# EAGLE board botão (EAGLE 9.7.0)

Size 156.94 x 59.69 mm. Coordinates in mm from the lower left corner, seen from the top.
Outline: 0,0 156.94,0 156.94,59.69 0,59.69 0,0
Copper layers (1*16): Top 0.035mm / dielectric 1.5mm / Bottom 0.035mm
Design rules "default": minimum track width 6mil, minimum drill 0.35mm, track to track 6mil, track to pad 6mil, pad to pad 6mil, via to via 6mil, smd to smd 6mil, copper to edge 40mil, drill to drill 6mil, minimum pad ring 10mil, minimum via ring 8mil, stop-mask expansion 4mil, vias tented up to drill 0mil, thermal gap 10mil

## Footprints (pad centres in the part's own frame; a part is rotated, then mirrored left to right if it is on the bottom)
LED-RGB-5MM = drill 0.9: B 0.635,0.635; C -0.635,-0.635; G 1.905,-0.635; R -1.905,0.635
RESAD1016W63L850D250B = drill 0.83 pad 1.43: 1 -5.08,0; 2 5.08,0
SWITCH-MOMENTARY-PTH-6.5MM = drill 1.016 pad 1.88: 1 -3.251,2.261; 2 3.251,2.261; 3 -3.251,-2.261; 4 3.251,-2.261
ARDUINO-UNO-R3-SHIELD = drill 1.016 pad 1.88: 3.3V 24.13,-2.54; 5V 24.13,0; A0 24.13,12.7; A1 24.13,15.24; A2 24.13,17.78; A3 24.13,20.32; A4 24.13,22.86; A5 24.13,25.4; AREF -24.13,-13.97; D2 -24.13,20.32; D3 -24.13,17.78; D4 -24.13,15.24; D5 -24.13,12.7; D6 -24.13,10.16; D7 -24.13,7.62; D8 -24.13,3.81; D9 -24.13,1.27; D10 -24.13,-1.27; D11 -24.13,-3.81; D12 -24.13,-6.35; D13 -24.13,-8.89; GND@0 24.13,2.54; GND@1 24.13,5.08; GND@2 -24.13,-11.43; IOREF 24.13,-7.62; NC 24.13,-10.16; RES 24.13,-5.08; RX -24.13,25.4; SCL -24.13,-19.05; SDA -24.13,-16.51; TX -24.13,22.86; VIN 24.13,7.62

## Placement (x,y rotation side)
D2  LED-RGBRCBG-PTH  [LED-RGB-5MM]  111.24,34.33 0 top
R4  220  [RESAD1016W63L850D250B]  150.61,47.03 90 top
R5  1k  [RESAD1016W63L850D250B]  109.97,11.47 90 top
R6  220  [RESAD1016W63L850D250B]  140.45,47.03 90 top
R7  220  [RESAD1016W63L850D250B]  130.29,47.03 90 top
S2  SWITCH_MOMENTARY  [SWITCH-MOMENTARY-PTH-6.5MM]  137.91,27.98 90 top
S3  SWITCH_MOMENTARY  [SWITCH-MOMENTARY-PTH-6.5MM]  127.75,27.98 90 top
S4  SWITCH_MOMENTARY  [SWITCH-MOMENTARY-PTH-6.5MM]  148.07,27.98 90 top
U1  ARDUINO-UNO-R3-SHIELD  [ARDUINO-UNO-R3-SHIELD]  47.88,29.84 270 top

## Library data of the parts
D2 R4-R7 S2-S4 U1 = Tinkercad

## Nets
D2_C: D2.C R5.2
U1_5V: S2.1 S2.2 S3.1 S3.2 S4.1 S4.2 U1.5V
U1_D2: D2.R U1.D2
U1_D3: R4.1 S4.3 S4.4 U1.D3
U1_D4: R6.1 S2.3 S2.4 U1.D4
U1_D5: R7.1 S3.3 S3.4 U1.D5
U1_D9: D2.B U1.D9
U1_D10: D2.G U1.D10
U1_GND: R4.2 R5.1 R6.2 R7.2 U1.GND@0 U1.GND@1 U1.GND@2

## Tracks (layer width: path | path; a pad name or v marks a point on that pad's centre or on a via)
D2_C  (1 unrouted)
U1_5V  (6 unrouted)
U1_D2  (1 unrouted)
U1_D3  (3 unrouted)
U1_D4  (3 unrouted)
U1_D5  (3 unrouted)
U1_D9  (1 unrouted)
U1_D10  (1 unrouted)
U1_GND  (6 unrouted)